# Altium PCB JBC_245_PCB.PcbDoc
Units mil, origin at the board's own origin, x right, y up, seen from the top; angles counter-clockwise.
Board outline 1003.94 x 629.92 mil, 4 copper layers (Top Layer, GND, POWER, Bottom Layer), stack 68.778 mil thick; 18 components, 20 nets, 83 pads, 51 vias.
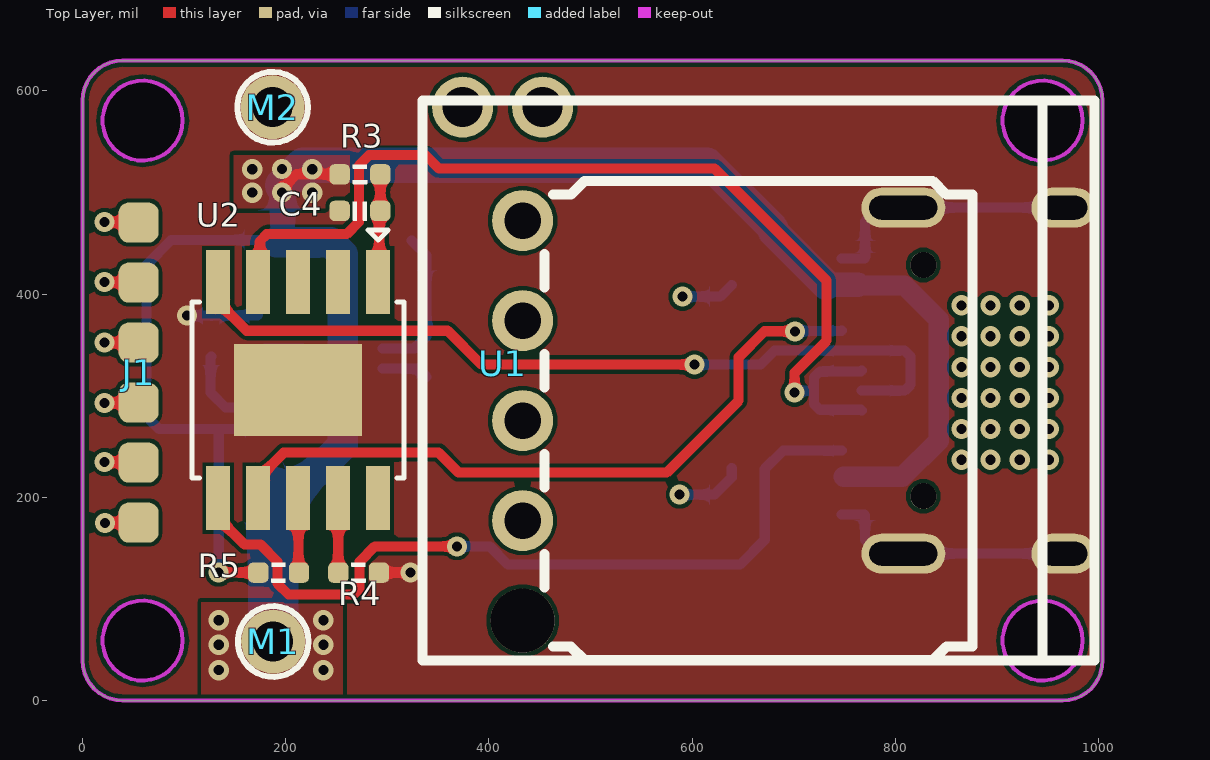
[diagram p0: Top Layer view]
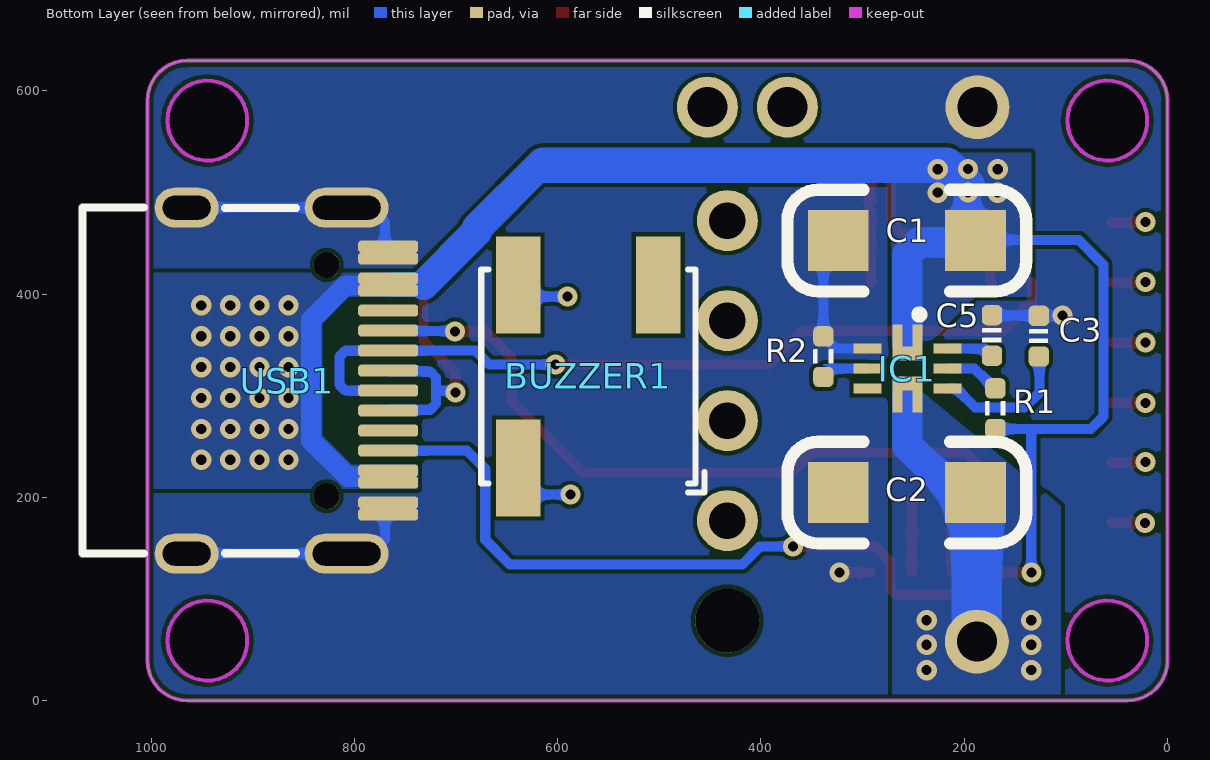
[diagram p1: Bottom Layer view, seen from below]
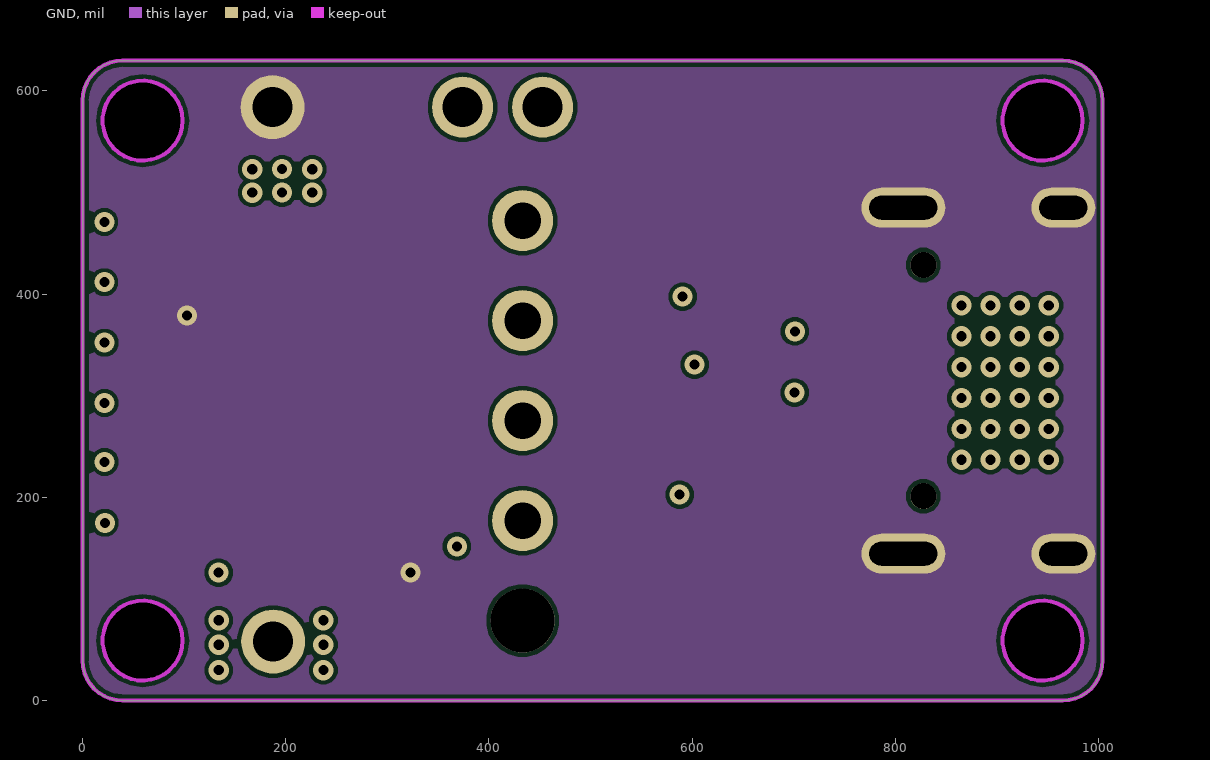
[diagram p2: GND]
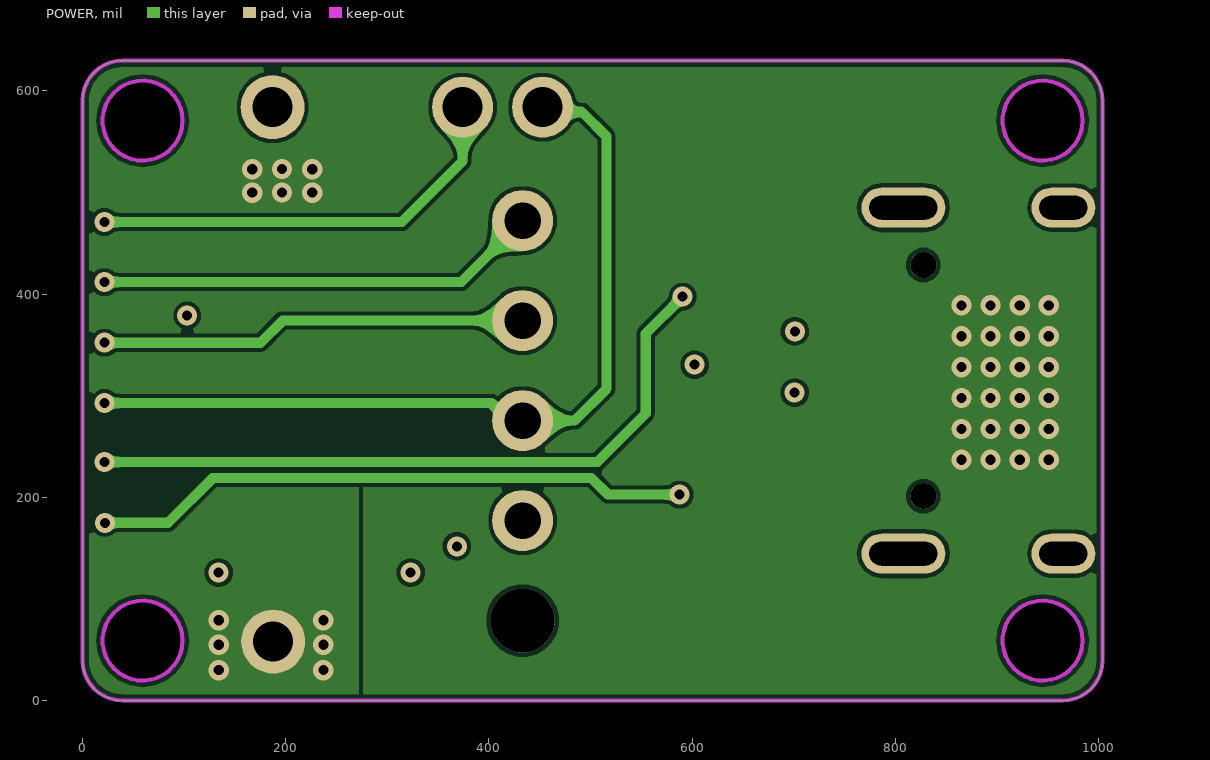
[diagram p3: POWER]
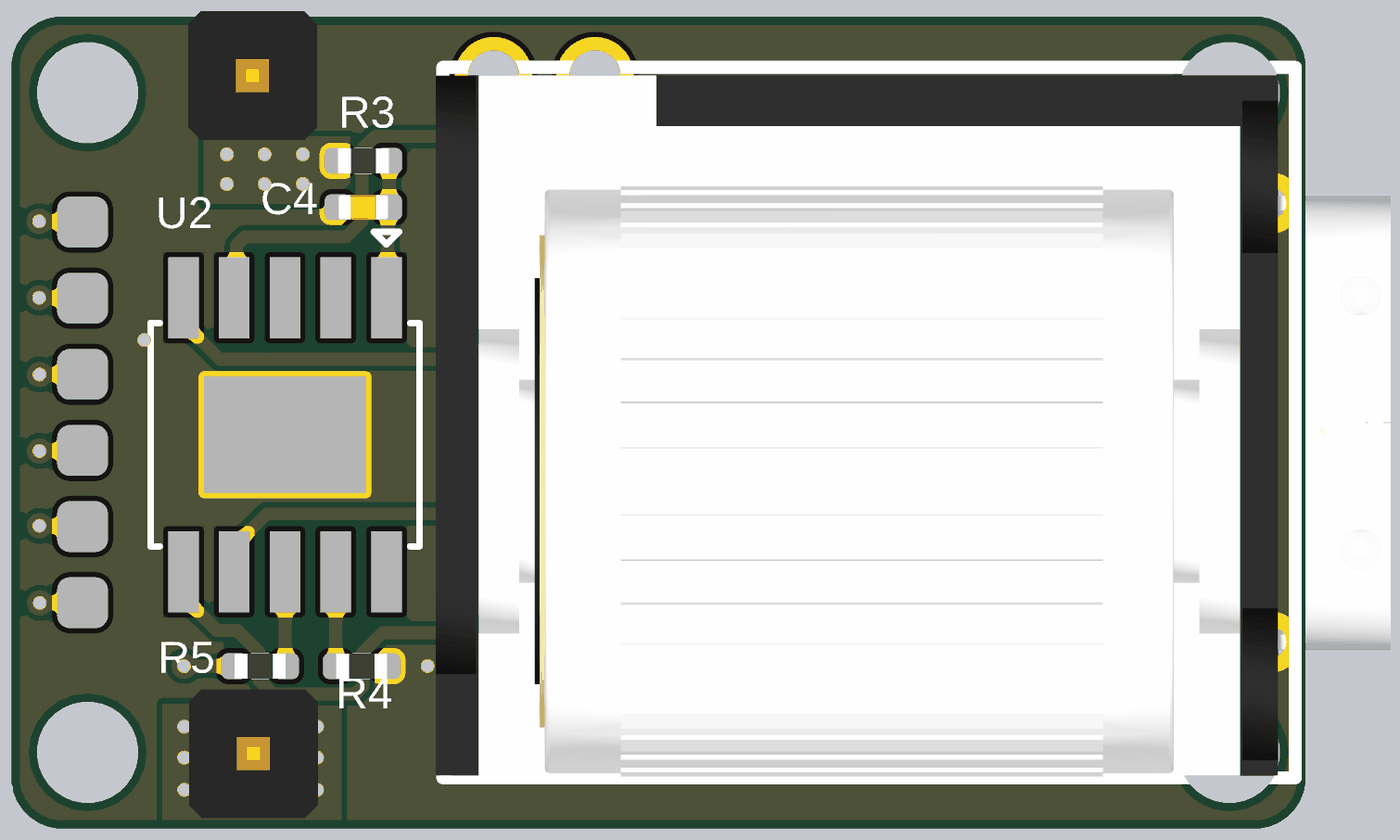
[diagram p4: 3D render of the assembled board from above, using the file's embedded part models]
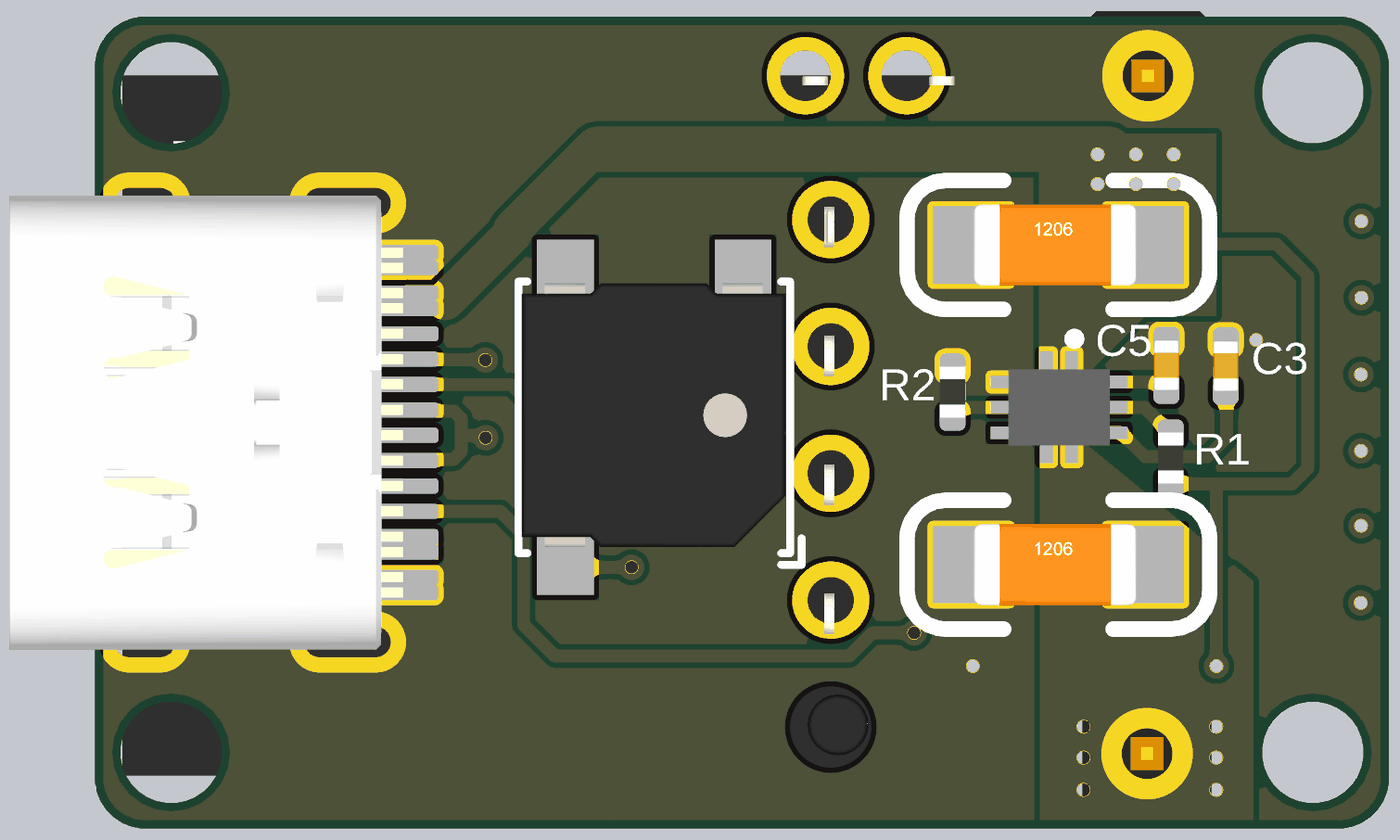
[diagram p5: 3D render of the assembled board from below, using the file's embedded part models]

## Layer stack, top to bottom
Top Solder: solder mask 0.8, Solder Resist, Dk 3.5
Top Layer: signal copper 1.4
Dielectric 2: prepreg 2.8, PP-006, Dk 4.1
GND: signal copper 0.689
Dielectric 1: core 59, Core-043, Dk 4.3
POWER: signal copper 0.689
Dielectric 3: prepreg 2.8, PP-006, Dk 4.1
Bottom Layer: signal copper 1.4
Bottom Solder: solder mask 0.8, Solder Resist, Dk 3.5

## Board outline
0,39.37 ccw(c39.37,39.37) 39.37,0 964.57,0 ccw(c964.57,39.37) 1003.94,39.37 1003.94,590.55 ccw(c964.57,590.55) 964.57,629.92 39.37,629.92 ccw(c39.37,590.55) 0,590.55
cut-out: 905.51,570.87 ccw(c944.88,570.87) 944.88,531.5 ccw(c944.88,570.87) 984.25,570.87 ccw(c944.88,570.87) 944.88,610.24 ccw(c944.88,570.87)
cut-out: 905.51,59.06 ccw(c944.88,59.06) 944.88,19.68 ccw(c944.88,59.06) 984.25,59.06 ccw(c944.88,59.06) 944.88,98.43 ccw(c944.88,59.06)
cut-out: 19.69,59.06 ccw(c59.06,59.06) 59.06,19.68 ccw(c59.06,59.06) 98.43,59.06 ccw(c59.06,59.06) 59.06,98.43 ccw(c59.06,59.06)
cut-out: 19.69,570.87 ccw(c59.06,570.87) 59.06,531.5 ccw(c59.06,570.87) 98.43,570.87 ccw(c59.06,570.87) 59.06,610.24 ccw(c59.06,570.87)

## Design rules (kind name [scope] priority, off if disabled: settings)
Clearance [All] p1: gap=4 ignorepadtopadclearanceinfootprint=FALSE
ComponentClearance [All] p1: gap=2 collisioncheckmode=3 verticalgap=2 showdistances=FALSE
MinimumSolderMaskSliver [All] p1: minsoldermaskwidth=1
PlaneConnect [All] p1: planeconnectstyle=Direct reliefexpansion=20 reliefentries=4 reliefconductorwidth=10 reliefairgap=10
PolygonConnect [All] p1: connectstyle=Direct reliefconductorwidth=10 reliefentries=4 polygonreliefangle="90 Angle" airgapwidth=10
RoutingVias [All] p1: holewidth=9.84 width=19.68 viastyle="Through Hole" minholewidth=7.87 minwidth=7.87 maxholewidth=28 maxwidth=50
SilkToSilkClearance [All] p1: silktosilkclearance=1
SilkToSolderMaskClearance [IsPad] p1: minsilkscreentomaskgap=1 clearancetoexposedcopper=TRUE
SolderMaskExpansion [All] p1: expansion=4 istentingtop=FALSE
Width [All] p1: maxlimit=100 minlimit=10 preferedwidth=10 midlayer1_maxwidth=10 midlayer2_maxwidth=10 minimp=50.000000 maximp=50.000000 favimp=50.000000
25 further rules are at their usual default settings.

## Components (designator, comment, footprint, x,y, rotation, side; value= is the part's Value field where it differs from the comment)
BUZZER1 "MLT-5020" BUZ-SMD_3P-L5.2-W5.2-P3.50-BR 570,319 r180 bottom
C1 "1uF" 1206C 323.98,452.76 r180 bottom
C2 "10uF" 1206C 323.98,204.72 r180 bottom
C3 "100pF" CAP_0402 126.6,358.75 r270 bottom
C4 "1uF" CAP_0402 273,482 r180 top
C5 "NS" CAP_0402 172.61,359.41 r270 bottom
IC1 "MP5016HGQH-Z" MP5016HGQHZ 255.91,326.77 r270 bottom
J1 "JBC245" JBC_245_CONNECT 55.12,322.83 r0 top
M1 "Test_Point" TP-PIN 187.63,58.09 r0 top
M2 "Test_Point" TP-PIN 187,584 r0 top
R1 "300k" RES_0402 169.29,287.4 r90 bottom
R2 "604Ω" RES_0402 338.58,338.58 r270 bottom
R3 "1k" RES_0402 273,518 r0 top
R4 "NC" RES_0402 271.65,125.98 r0 top
R5 "10k" RES_0402 192.91,125.98 r180 top
U1 "Roll Encoder - EVQWGD001" "EVQWGD001 ENCODER" 413.38,331.39 r0 top locked
U2 "CH224K" ESSOP-10_L5.0-W3.9 212.17,305.5 r0 top
USB1 "Type-C" TYPE-C-TOP 866.14,314.96 r0 bottom

## Footprints (in the part's own frame and the unit in brackets; to place one, negate y for a bottom-side part, rotate by r counter-clockwise, add the part's x,y. Pads: shape width x height; smd on the part's side, far side on the other; paste and mask are expansions set on the pad)
1206C [mil]
  rect 60x60 smd: 1(0,0) 2(135,0)
  silkscreen extent -50,-50 185,50, body extent 2,-31 128,31, height 39
BUZ-SMD_3P-L5.2-W5.2-P3.50-BR [mm]
  rect 1.12x2.425 smd: 1(1.75,2.287) 2(-1.75,2.287) 3(-1.75,-2.287)
  silkscreen extent -2.68,-2.9 2.9,2.68, body extent -2.61,-2.56 2.59,2.64, height 2
CAP_0402 [mil]
  rrect50% 20x20 smd: 1(-20,0) 2(20,0)
  silkscreen extent -7,-9 7,9, body extent -20,-10 20,10, height 20
ESSOP-10_L5.0-W3.9 [mm]
  rect 3.2x2.3 smd: 0(0,0)
  rect 0.6x1.6 smd: 1(2,2.7) 2(1,2.7) 3(0,2.7) 4(-1,2.7) 5(-2,2.7) 6(-2,-2.7) 7(-1,-2.7) 8(0,-2.7) 9(1,-2.7) 10(2,-2.7)
  silkscreen extent -2.65,-2.2 2.65,4
"EVQWGD001 ENCODER" [mil]
  round 60 hole 39.37: 1(-39.37,252.66) 2(39.37,252.66)
  round 60 hole 36: 3(19.69,141.05) 4(19.69,42.62) 5(19.69,-55.81) 6(19.69,-154.23)
  round 62.99 hole 62.99 unplated: ""(19.69,-252.66)
  silkscreen extent -79,-292 583,259, body extent -84,-292 569,253, height 531
JBC_245_CONNECT [mm]
  rrect50% 1x1 smd: 1(0,3.75) 2(0,2.25) 3(0,0.75) 4(0,-0.75) 5(0,-2.25) 6(0,-3.75)
MP5016HGQHZ [mm]
  rect 0.55x0.25 smd: 1(-0.825,0.25) 2(-0.825,-0.25) 6(0.825,-0.25) 7(0.825,0.25)
  rect 0.25x0.7 smd: 3(-0.5,-1) 4(0,-1) 5(0.5,-1) 8(0.5,1) 9(0,1) 10(-0.5,1)
  rect 0.35x0.75 smd: A1(-0.375,0) A7(0.375,0)
  silkscreen extent -1.45,0.2 -1.25,0.4, body extent -0.75,-1 0.75,1, height 1
RES_0402 [mil]
  rrect50% 20x20 smd: 1(-20,0) 2(20,0)
  silkscreen extent -7,-10 7,10, body extent -20,-10 20,10, height 14
TP-PIN [mm]
  round 1.6 hole 1: 1(0,0)
  silkscreen extent -0.88,-0.88 0.88,0.88, body extent -1.27,-1.27 1.27,1.27, height 8.89
TYPE-C-TOP [mm]
  round 0.65 hole 0.65: 0(-0.98,-2.89) 0(-0.98,2.89)
  oval 1.6x1 hole 0.6 slot 1.2 at 0 deg: 1(2.52,4.325) 2(2.52,-4.325)
  oval 2.1x1 hole 0.6 slot 1.7 at 0 deg: 3(-1.48,-4.325) 4(-1.48,4.325)
  rrect50% 1.5x0.3 smd: A1(-2.52,-3.35) A4(-2.52,-2.55) A5(-2.52,-1.25) A6(-2.52,-0.25) A7(-2.52,0.25) A8(-2.52,1.25) A9(-2.52,2.55) A12(-2.52,3.35) B1(-2.52,3.05) B4(-2.52,2.25) B5(-2.52,1.75) B6(-2.52,0.75) B7(-2.52,-0.75) B8(-2.52,-1.75) B9(-2.52,-2.25) B12(-2.52,-3.05)
  silkscreen extent -0.22,-4.33 5.12,4.33, body extent -2.57,-4.48 5.18,4.47, height 3.26

## Part data
BUZZER1: "Buzzer", BOM_JLCPCB Part Class="Extended Part", BOM_Manufacturer=HNDZ, BOM_Manufacturer Part=MLT-5020, BOM_Supplier=LCSC, BOM_Supplier Part=C94598, spicePre=B, spiceSymbolName=MLT-5020
C1 C2: library part CAP, "无极性电容"
C3 C4 C5: library part 0402YC104MAT2A, "Capacitor", Manufacturer_Name=AVX, Mouser Part Number=581-0402YC104MAT2A, Datasheet Link=http://www.mouser.com/catalog/supplier/library/pdf/AVXSurfaceMountCeramic.pdf, Height=0.56mm, Manufacturer_Part_Number=0402YC104MAT2A, Mouser Price/Stock=https://www.mouser.co.uk/ProductDetail/AVX/0402YC104MAT2A?qs=O2%2FeDh0sX9yiCaLwpXy1bw%3D%3D
IC1: "Integrated Circuit", Manufacturer_Name="Monolithic Power Systems (MPS)", Mouser Part Number=946-MP5016HGQH-Z, Datasheet Link=https://componentsearchengine.com/Datasheets/1/MP5016HGQH-Z.pdf, Height=0.9mm, Manufacturer_Part_Number=MP5016HGQH-Z, Mouser Price/Stock=https://www.mouser.co.uk/ProductDetail/Monolithic-Power-Systems-MPS/MP5016HGQH-Z?qs=YCa%2FAAYMW00hGdkGCCsW%252Bw%3D%3D
J1: library part JBC_245_Connect
R1 R2 R3 R4 R5: library part RC0402JR-1320RL, "Resistor", Manufacturer_Name="YAGEO (PHYCOMP)", Mouser Part Number=603-RC0402JR-1320RL, Datasheet Link=http://www.yageo.com/documents/recent/PYu-RC0402_51_RoHS_L_6_r.pdf, Height=0.4mm, Manufacturer_Part_Number=RC0402JR-1320RL, Mouser Price/Stock=https://www.mouser.co.uk/ProductDetail/YAGEO/RC0402JR-1320RL?qs=qpJ%252B%252B%252Bdg6p3JDOvGKPULsg%3D%3D
U1: BOM_Manufacturer=Panasonic, BOM_Manufacturer Part=EVQWGD001, BOM_Supplier=Aliexpress, BOM_Supplier Part=EVQWGD001, Contributor=ChristAlix, spicePre=U, spiceSymbolName="Roll Encoder - EVQWGD001"
USB1: library part USB-Type-C-TOP
U2: Contributor=小茅, spicePre=U, spiceSymbolName=CH224K

## Via types
v1: diameter 20, hole 10, Top Layer to Bottom Layer, tented both sides, 34 vias
v2: diameter 19.68, hole 9.84, Top Layer to Bottom Layer, tented both sides, 17 vias

## Nets (pads, with @x,y where several pads share a name; then routed paths per layer and width w, separated by ;. In a path a pad name is that pad's centre, name@x,y a point inside that pad or via, vN(x,y) a via of type N, cw(c..) or ccw(c..) an arc to the next point about the centre after c; other vN are vias at no path point)
CC1: U2.7 USB1.A5 | length 695.6
  Top Layer w10: U2.7 172.8,218.88 198.02,244.09 350.39,244.09 370.08,224.41 574.8,224.41 645.67,295.28 645.67,337.93 671.2,363.46 v2(701.05,363.46)
  Bottom Layer w10: v2(701.05,363.46) 701.4,363.82 746.89,363.82 USB1.A5@747.24,364.17
CC2: U2.6 USB1.B5 | length 807.1
  Top Layer w10: U2.6 133.43,179.51 159.2,153.74 174.95,153.74 191.91,136.78 191.91,115.15 202.61,104.45 266.8,104.45 272.65,110.31 272.65,136.78 287.65,151.77 v2(368.38,151.77)
  Bottom Layer w10: v2(368.38,151.77) 400.72,151.77 418.63,133.86 646.98,133.86 671.4,158.28 671.4,228.03 689.44,246.06 USB1.B5@747.24,246.06
DN: U2.5 USB1.A7 USB1.B7 | length 812.8
  Top Layer w10: U2.5 133.43,392.11 161.47,364.08 359.32,364.08 392.69,330.71 v2(602.36,330.71)
  Bottom Layer w10: v2(602.36,330.71) 667.26,330.71 681.03,344.49 USB1.B7 809.05,344.49 814.96,338.58 814.96,311.02 809.06,305.12 USB1.A7
DP: U2.4 USB1.A6 USB1.B6 | length 986.7
  Top Layer w10: U2.4 174.58,413.57 174.58,452.43 181.26,459.11 259.91,459.11 272,471.2 272,526.8 282.2,537 337.48,537 350.86,523.62 622.05,523.62 732.28,413.39 732.28,354.33 700.79,322.83 v2(700.79,303.15)
  Bottom Layer w10: v2(700.79,303.15) 702.64,305 719.69,305 719.8,305.12 ; USB1.B6 766.02,286.34 725.66,286.34 719.8,292.2 719.8,305.12 ; USB1.A6 766.02,323.9 725.66,323.9 719.8,318.04 719.8,305.12
GND: C1.1 C2.1 C3.1 C4.2 C5.1 IC1.3 M2.1 R2.1 R4.2 U2.0 USB1.1 USB1.2 USB1.3 USB1.4 USB1.A1 USB1.A12 USB1.B1 USB1.B12 | length 718.2
  Top Layer w10: R4.2 v2(322.83,125.98)
  Bottom Layer w10: v2(103,379) 103.13,378.87 126.48,378.87 C3.1 126.94,379.08 172.28,379.08 C5.1 ; IC1.3 326.46,346.46 R2.1 338.58,438.15 C1.1 ; USB1.A12@747.24,183.07 769.27,183.07 770.18,182.17 770.18,158.25 783.74,144.69 USB1.1@945.67,144.69 ; USB1.B12@747.24,435.04 769.27,435.04 770.18,435.95 770.18,471.67 783.74,485.24 USB1.2@945.67,485.24
NetBUZZER1_2: BUZZER1.2 J1.5 | length 769.3
  Top Layer w10: v2(21.64,234.9) 21.97,234.57 54.8,234.57 J1.5
  POWER w10: v2(21.64,234.9) 506.55,234.9 554.3,282.65 554.3,361.39 v2(590.55,397.64)
  Bottom Layer w10: v2(590.55,397.64) 627.48,397.64 BUZZER1.2
NetBUZZER1_3: BUZZER1.3 J1.6 | length 691.5
  Top Layer w10: v2(21.9,175.02) 21.99,175.11 55.03,175.11 J1.6
  POWER w10: v2(21.9,175.02) 84,175 128,219 500.92,219 517.23,202.69 v2(587.59,202.69)
  Bottom Layer w10: v2(587.59,202.69) 621.85,202.69 638.9,219.74 BUZZER1.3
NetC2_2: C2.2 IC1.6 IC1.7 IC1.A7 M1.1 | length 270.2
  Bottom Layer w30: C2.2@205.66,200.79 255.91,251.03 255.91,303
  Bottom Layer w50: M1.1 187.63,203.38 C2.2
  other v1: 134,30 237,30 134,55 237,55 134,79 237,79
NetC3_2: C3.2 IC1.8 | length 140.3
  Bottom Layer w10: C3.2 125.98,338.13 125.98,303.15 140.73,288.4 189.15,288.4 207.83,307.09 IC1.8
NetC5_2: C5.2 IC1.10 | length 46.8
  Bottom Layer w10: C5.2 179.66,346.46 IC1.10
NetIC1_4: IC1.4 R2.2 | length 46.7
  Bottom Layer w10: IC1.4 330.39,326.77 R2.2
NetIC1_9: IC1.9 R1.2 | length 55.3
  Bottom Layer w10: R1.2 174.29,312.4 175.4,312.4 189.77,326.77 IC1.9
NetJ1_1: J1.1 U1.1 | length 464.4
  Top Layer w10: v2(21.44,471.1) 21.75,470.79 54.8,470.79 J1.1
  POWER w10: v2(21.44,471.1) 314.1,471.1 374.01,531.01 U1.1
NetJ1_2: J1.2 U1.3 | length 470.6
  Top Layer w10: v2(21.43,411.79) 21.62,411.6 54.93,411.6 J1.2
  POWER w10: v2(21.43,411.79) 21.64,412 372.63,412 U1.3
NetJ1_3: J1.3 U1.4 | length 453.8
  Top Layer w10: v2(21.72,352.24) 21.78,352.3 55.06,352.3 J1.3
  POWER w10: v2(21.72,352.24) 175.07,352.24 196.85,374.02 U1.4
NetJ1_4: J1.4 U1.2 U1.5 | length 870.9
  Top Layer w10: v2(21.71,292.91) 21.91,293.11 54.92,293.11 J1.4
  POWER w10: v2(21.71,292.91) 402.21,292.91 419.54,275.58 484.24,275.58 515.75,307.09 515.75,555.12 491.6,579.26 457.54,579.26 U1.2
NetR4_1: R4.1 U2.9 | length 73.3
  Top Layer w10: U2.9 251.6,199.14 251.6,126.04 R4.1
NetR5_1: R5.1 U2.8 | length 73.1
  Top Layer w10: U2.8 212.39,198.99 212.39,126.51 R5.1@212.6,126.3
VBUS: C1.2 IC1.1 IC1.2 IC1.A1 R1.1 R3.1 R5.2 USB1.A4 USB1.A9 USB1.B4 USB1.B9 | length 1792.6
  Top Layer w10: v2(133.86,125.98) R5.2 ; v2@197,507 199.62,507 210.62,518 R3.1
  Bottom Layer w10: v2(133.86,125.98) 134,126.12 134,266.81 ; R1.1 75.12,267.4 62.99,279.53 62.99,429.13 87.28,453.42 C1.2@173.23,453.42 ; USB1.B9@765.9,409.25 765.9,414.32 USB1.A4
  Bottom Layer w20: C1.2 C1.2@190.78,450.95 ; USB1.A9@748.85,220.17 766.93,220.17 806.78,220.17 842.52,255.91 842.52,374.74 808.65,408.61 766.55,408.61 USB1.B9@765.9,409.25 ; USB1.B9@762.85,409.43 USB1.B9@764.52,407.76
  Bottom Layer w24: C1.2 197,460.78 v2@197,507 ; 732.02,409.43 USB1.B9@762.85,409.43
  Bottom Layer w30: C1.2@190.78,450.95 234,450.95 244.19,450.95 255.91,439.23 255.91,350.24 ; 614.45,527 617.61,527 679.95,464.66 679.95,461.45 731.96,409.43 732.02,409.43
  Bottom Layer w35: v2@197,507 217,527 614.45,527
  other v1: 865,237 893.67,237 922.33,237 951,237 865,267.4 893.67,267.4 922.33,267.4 951,267.4 865,297.8 893.67,297.8 922.33,297.8 951,297.8 865,328.2 893.67,328.2 922.33,328.2 951,328.2 865,358.6 893.67,358.6 922.33,358.6 951,358.6 865,389 893.67,389 922.33,389 951,389 167,500 226,500 167,523 226,523
  other v2: 196.34,500 196.34,523
VDD: C4.1 R3.2 U2.1 | length 107.6
  Top Layer w10: U2.1 291.96,412.84 291.96,480.96 C4.1@293.25,482.25 ; C4.1 C4.1@293.25,482.25 ; R3.2 293,482.51 C4.1@293.25,482.25
pads on no net: BUZZER1.1 IC1.5 U1. U1.6 U2.2 U2.3 U2.10 USB1.0 USB1.A8 USB1.B8

## Polygon pours and split planes (outlines as drawn)
NetC2_2 on Bottom Layer "NETC2_2_L04_P005" (solid, remove dead copper, pour order 5): 260.16,319 105,191.92 105,0 270,0 271,-1 271,319
VBUS on Bottom Layer "VBUS_L04_P006" (solid, remove dead copper, pour order 6): 737.43,232.34 737.55,232.27 737.55,232.23 737.55,208.58 1003.58,208.58 1005,210 1005,421 738,421 736.02,422.98 735.93,422.89 735.93,397.4 805.6,397.4 832,371 832,261 803,232 802.68,232.32 737.68,232.32 737.6,232.32 737.55,232.34 737.55,232.27 738,232
GND on Bottom Layer "GND_L04_P007" (solid, remove dead copper, pour order 7): 0,629.92 1003.94,629.92 1003.94,0 0,0
VBUS on Bottom Layer "VBUS_L04_P000" (solid, pour order 0): 271.49,354.14 271.65,539.37 133.86,539.37 133.86,397.64 188.98,397.64 232.48,354.14
NetC2_2 on POWER "NETC2_2_L03_P001" (solid, remove dead copper, pour order 1): 272,0 0,0 0,307.92 272,307.92
VBUS on POWER "VBUS_L03_P008" (solid, remove dead copper, pour order 8): 0,629.92 1003.94,629.92 1003.94,0 0,0
VBUS on Top Layer "VBUS_L01_P009" (solid, remove dead copper, pour order 9): 149,537 149,484.64 262.82,484.64 262.82,537
NetC2_2 on Top Layer "NETC2_2_L01_P003" (solid, remove dead copper, pour order 3): 117,97 117,5 256,5 256,97
GND on Top Layer "GND_L01_P010" (solid, remove dead copper, pour order 10): 0,629.92 1003.94,629.92 1003.94,0 0,0
GND on GND "GND_L02_P004" (solid, remove dead copper, pour order 4): 0,629.92 1003.94,629.92 1003.94,0 0,0

## Keep-outs
Keep-Out Layer:
  circle w3.94: c944.88,59.06 r39.37
  circle w3.94: c944.88,570.87 r39.37
  circle w3.94: c59.06,59.06 r39.37
  circle w3.94: c59.06,570.87 r39.37
  lines w3.94: 0,39.37 ccw(c39.37,39.37) 39.37,0 964.57,0 ccw(c964.57,39.37) 1003.94,39.37 1003.94,590.55 ccw(c964.57,590.55) 964.57,629.92 39.37,629.92 ccw(c39.37,590.55) 0,590.55 0,39.37